# Altium PCB GalvoPrint.PcbDoc
Units mm, origin at the board's own origin, x right, y up, seen from the top; angles counter-clockwise.
Board outline 100 x 50 mm, 2 copper layers (Top Layer, Bottom Layer); 85 components, 142 nets, 366 pads, 181 vias.
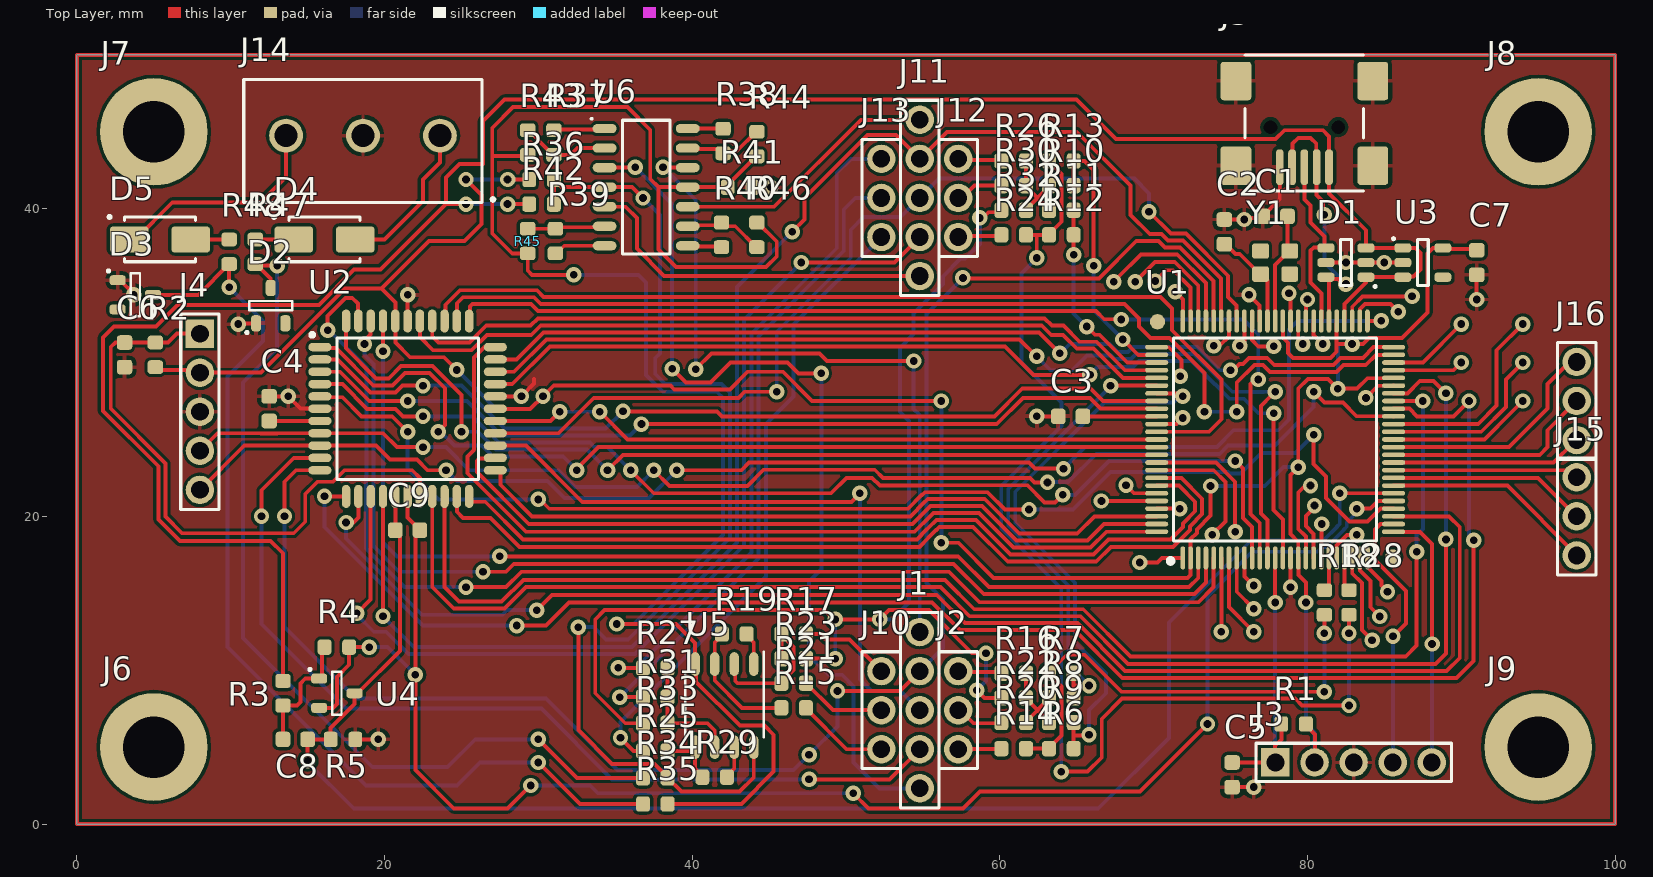
[diagram p0: Top Layer view]
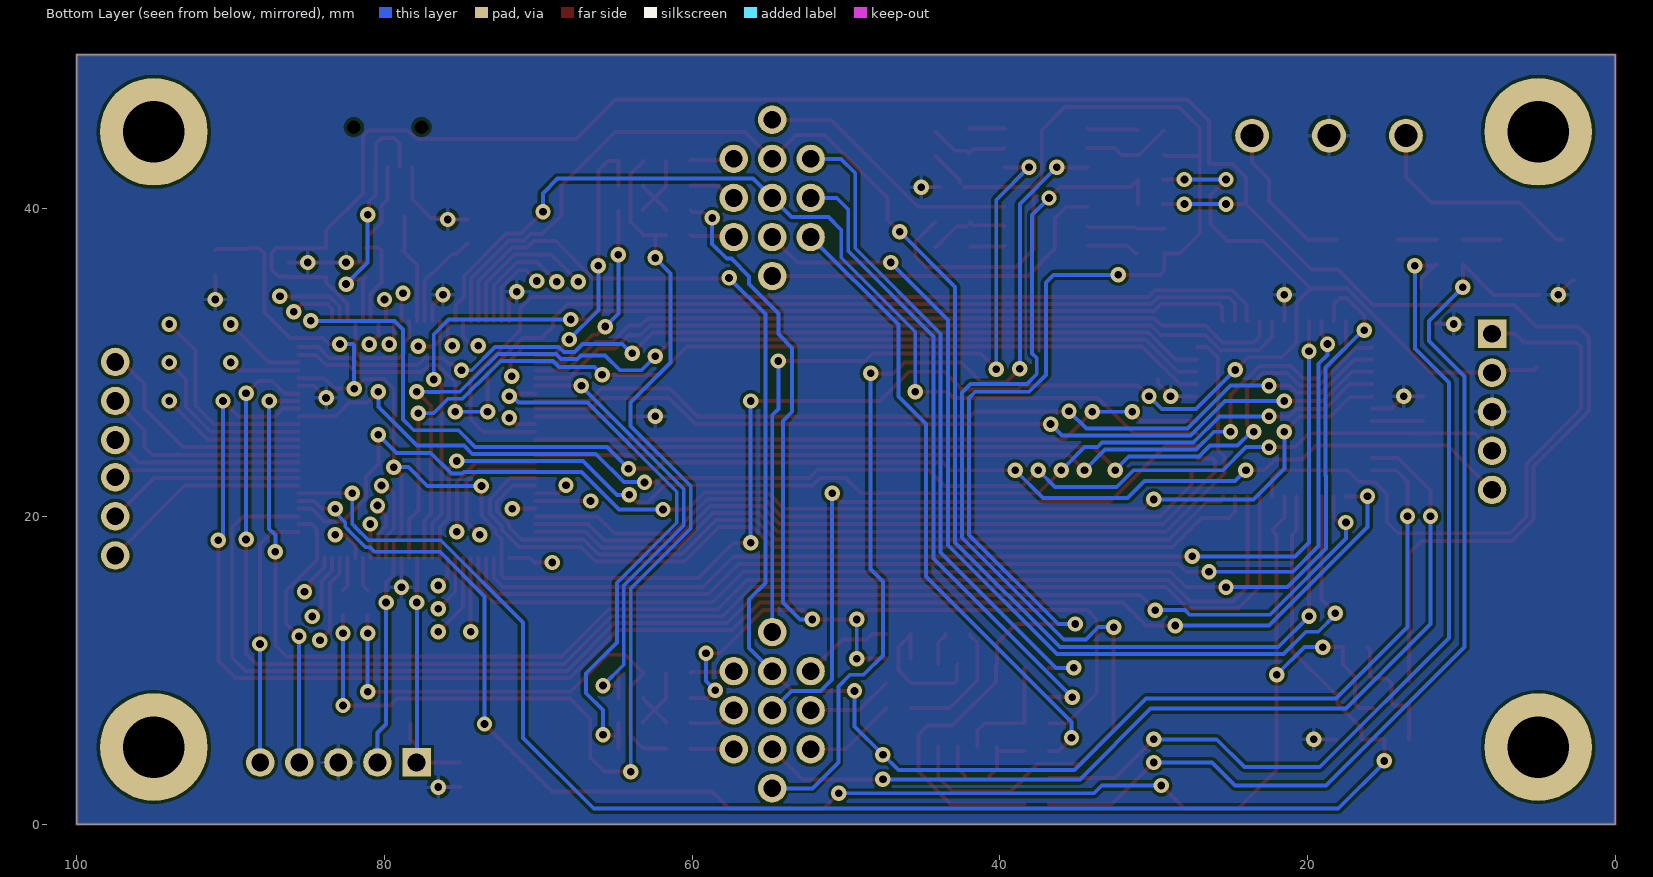
[diagram p1: Bottom Layer view, seen from below]
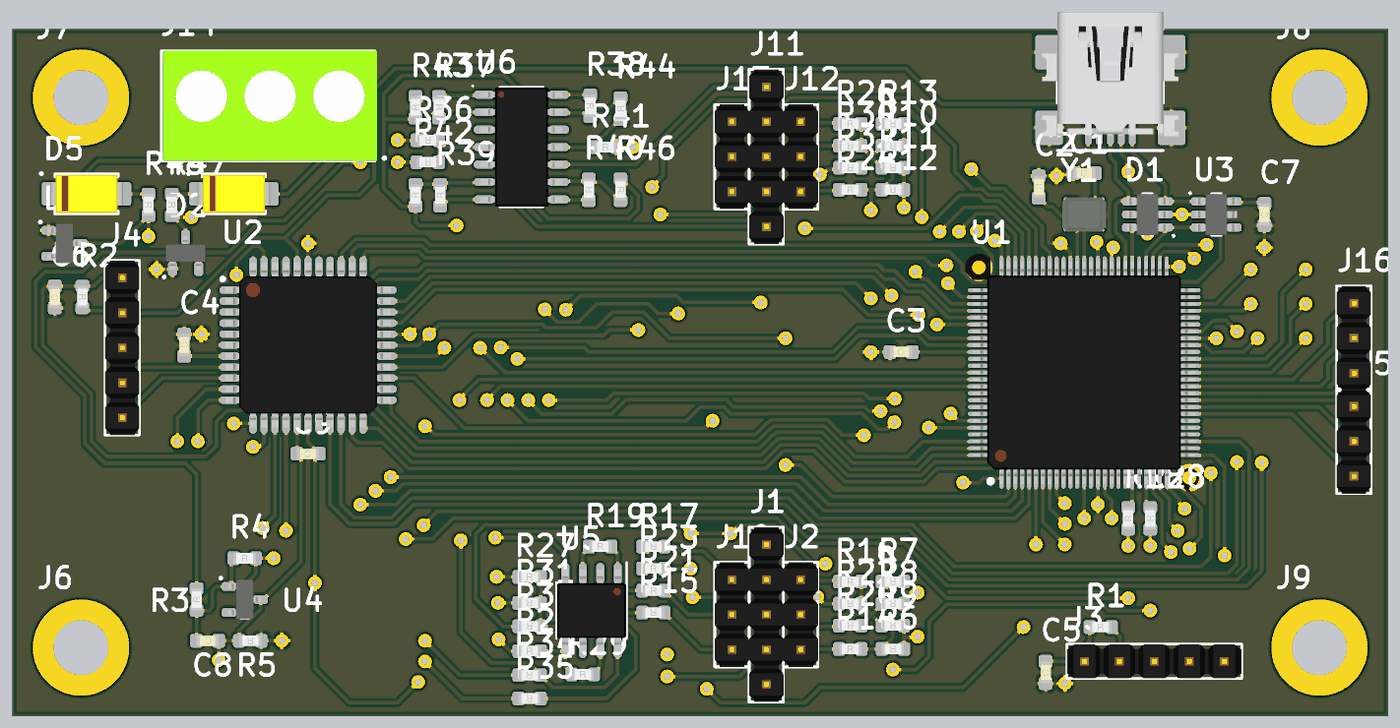
[diagram p2: 3D render of the assembled board from above, using the file's embedded part models]

## Layer stack, top to bottom
Top Solder: solder mask 0.0102, Solder Resist, Dk 3.5
Top Layer: signal copper 0.0356
Dielectric 1: dielectric 0.32, FR-4, Dk 4.8
Bottom Layer: signal copper 0.0356
Bottom Solder: solder mask 0.0102, Solder Resist, Dk 3.5

## Board outline
0,0 100,0 100,50 0,50

## Design rules (kind name [scope] priority, off if disabled: settings)
Clearance [All] p1: gap=0.2 ignorepadtopadclearanceinfootprint=FALSE
ComponentClearance [All] p1 off: gap=0.254 collisioncheckmode=3 verticalgap=0.254 showdistances=FALSE
PolygonConnect [All] p1: connectstyle=Relief reliefconductorwidth=0.254 reliefentries=4 polygonreliefangle="90 Angle" airgapwidth=0.254
RoomDefinition GalvoPrint [InComponentClass('GalvoPrint')] p1: confinementstyle=ConfineIn formatcopy=TRUE lockcomponents=FALSE outline 0,0 152.4,0 152.4,101.585 0,101.585
RoutingVias [All] p1: holewidth=0.711 width=1.27 viastyle="Through Hole" minholewidth=0.711 minwidth=1.27 maxholewidth=0.711 maxwidth=1.27
SolderMaskExpansion [All] p1: expansion=0.102
Width [All] p1: maxlimit=5 minlimit=0.2 preferedwidth=0.25
29 further rules are at their usual default settings.

## Components (designator, comment, footprint, x,y, rotation, side; value= is the part's Value field where it differs from the comment)
C1 "C" 0603_C 77.9,39.5 r0 top value=22pF
C2 "C" 0603_C 74.6,38.5 r270 top value=22pF
C3 "C" 0603_C 64.6,26.5 r0 top value=10uF
C4 "C" 0603_C 12.5,27 r270 top value=10uF
C5 "C" 0603_C 75.1,3.2 r90 top value=100nF
C6 "C" 0603_C 3.1,30.5 r90 top value=100nF
C7 "C" 0603_C 91,36.5 r90 top value=10uF
C8 "C" 0603_C 14.2,5.5 r180 top value=10uF
C9 "C" 0603_C 21.5,19.1 r0 top value=10uF
D1 "SMS05T1G" SOT23_6 82.5,36.5 r180 top
D2 "10V" SOT23_3 12.6,33.7 r90 top
D3 "10V" SOT23_3 3.8,34.4 r0 top
D4 "1N4007" SMA 16.102,38 r0 top
D5 "1N4007" SMA 5.4,38 r0 top
J1 "CON_5" HDR_254_5#1 54.8,7.4 r90 top
J2 "CON_3" HDR_254_3 57.3,7.4 r90 top
J3 "CON_5" HDR_254_5#2 83,4 r0 top value=PGM
J4 "CON_5" HDR_254_5#2 8,26.8 r270 top value=PGM
J5 "CON_USB" CON_USB_MINI 79.8,45.3 r180 top
J6 "CON_1" MOUNT_HOLE#1 5,5 r0 top
J7 "CON_1" MOUNT_HOLE#2 4.9,45 r0 top
J8 "CON_1" MOUNT_HOLE#1 95,45 r0 top
J9 "CON_1" MOUNT_HOLE#1 95,5 r0 top
J10 "CON_3" HDR_254_3 52.3,7.4 r90 top
J11 "CON_5" HDR_254_5#1 54.8,40.7 r90 top
J12 "CON_3" HDR_254_3 57.3,40.7 r90 top
J13 "CON_3" HDR_254_3 52.3,40.7 r90 top
J14 "CON_3" HDR_500_3 18.6,44.4 r180 top
J15 "CON_3" HDR_254_3 97.5,20 r90 top
J16 "CON_3" HDR_254_3 97.5,27.5 r90 top
R1 "R" 0603_R 79.1,6.5 r0 top value=4K7
R2 "R" 0603_R 5.1,30.5 r270 top value=4K7
R3 "R" 0603_R 13.4,8.5 r90 top value=1K
R4 "R" 0603_R 16.9,11.5 r0 top value=0R
R5 "R" 0603_R 17.3,5.5 r180 top value=0R
R6 "0" 0603_R 64,4.9 r180 top
R7 "=Value" 0603_R 64,9.8 r180 top
R8 "0" 0603_R 64,8.2 r180 top
R9 "=Value" 0603_R 64,6.6 r180 top
R10 "0" 0603_R 64,41.5 r180 top
R11 "=Value" 0603_R 64,39.9 r180 top
R12 "0" 0603_R 64,38.3 r180 top
R13 "=Value" 0603_R 64,43.1 r180 top
R14 "10k" 0603_R 60.9,4.9 r0 top
R15 "10k" 0603_R 46.6,7.55 r180 top
R16 "10k" 0603_R 60.9,9.8 r0 top
R17 "10k" 0603_R 46.6,12.35 r180 top
R18 "10k" 0603_R 81.1,14.4 r90 top
R19 "10k" 0603_R 42.735,12.35 r0 top
R20 "10k" 0603_R 60.9,6.6 r180 top
R21 "10k" 0603_R 46.6,9.15 r0 top
R22 "10k" 0603_R 60.9,8.2 r180 top
R23 "10k" 0603_R 46.6,10.75 r0 top
R24 "10k" 0603_R 60.9,38.3 r0 top
R25 "10k" 0603_R 37.6,4.75 r0 top
R26 "10k" 0603_R 60.9,43.1 r0 top
R27 "10k" 0603_R 37.6,10.15 r0 top
R28 "10k" 0603_R 82.7,14.4 r90 top
R29 "10k" 0603_R 41.465,3.05 r0 top
R30 "10k" 0603_R 60.9,41.5 r180 top
R31 "10k" 0603_R 37.6,8.25 r180 top
R32 "10k" 0603_R 60.9,39.9 r180 top
R33 "10k" 0603_R 37.6,6.55 r180 top
R34 "0" 0603_R 37.6,3 r180 top
R35 "0" 0603_R 37.6,1.3 r180 top
R36 "0" 0603_R 30.208,41.9 r180 top
R37 "10k" 0603_R 31.008,44.3 r270 top
R38 "10k" 0603_R 42.008,44.4 r270 top
R39 "10k" 0603_R 31.108,37.9 r90 top
R40 "10k" 0603_R 41.908,38.3 r90 top
R41 "0" 0603_R 43.108,41.4 r0 top
R42 "0" 0603_R 30.208,40.3 r180 top
R43 "10k" 0603_R 29.308,44.3 r90 top
R44 "10k" 0603_R 44.208,44.2 r90 top
R45 "10k" 0603_R 29.308,37.9 r90 top
R46 "10k" 0603_R 44.208,38.3 r270 top
R47 "R" 0603_R 11.6,37.2 r270 top value=200
R48 "R" 0603_R 9.9,37.2 r270 top value=200
U1 "IC_PIC24FJ128GC010" TQFP_100 77.9,25 r90 top locked value=PIC24FJ128GC010
U2 "IC_PIC33FJ128GP804" TQFP_44 21.5,27 r0 top locked value=PIC33FJ128GP804
U3 "BU33TD3WG" SOT23_5 87.5,36.5 r0 top
U4 "IC_TL431_SOT23_3" SOT23_3 16.9,8.5 r0 top value=TL431
U5 "MCP6022" SOIC_8 42.1,7.697 r270 top
U6 "MCP6024" SOIC_14 37.008,41.4 r0 top
Y1 "XTAL_OSC1OSC3" OSC_DFN_2x2.5mm 77.9,36.5 r270 top value=OSC

## Footprints (in the part's own frame and the unit in brackets; to place one, negate y for a bottom-side part, rotate by r counter-clockwise, add the part's x,y. Pads: shape width x height; smd on the part's side, far side on the other; paste and mask are expansions set on the pad)
0603_C [mm]
  rrect42% 0.95x1 smd mask+0.075: 1(-0.8,0) 2(0.8,0)
  body extent -0.8,-0.4 0.8,0.4, height 0.95
0603_R [mm]
  rrect44% 0.9x1 smd mask+0.075: 1(-0.8,0) 2(0.8,0)
  body extent -0.8,-0.4 0.8,0.4, height 0.55
CON_USB_MINI [mm]
  rrect80% 0.5x2.3 smd mask+0.075: 1(-1.6,2.6) 2(-0.8,2.6) 3(0,2.6) 4(0.8,2.6) 5(1.6,2.6)
  rrect20% 2x2.5 smd mask+0.075: 6(4.45,2.5) 7(4.45,-3) 8(-4.45,-3) 9(-4.45,2.5)
  round 0.5 hole 0.9 unplated mask+0.275: 10(-2.2,0) 11(2.2,0)
  silkscreen extent -3.85,-4.7 3.85,4.15, body extent -4.95,-5.9 4.95,3.1, height 3.95
HDR_254_3 [mm]
  round 1.85 hole 1.15 mask+0.075: 1(-2.54,0) 2(0,0) 3(2.54,0)
  silkscreen extent -3.8,-1.25 3.8,1.25, body extent -3.81,-1.25 3.81,1.25, height 8
HDR_254_5#1 [mm]
  round 1.85 hole 1.15 mask+0.075: 1(-5.08,0) 2(-2.54,0) 3(0,0) 4(2.54,0) 5(5.08,0)
  silkscreen extent -6.35,-1.25 6.35,1.25, body extent -6.35,-1.25 6.35,1.25, height 8
HDR_254_5#2 [mm]
  rect 1.85x1.85 hole 1.15 mask+0.075: 1(-5.08,0)
  round 1.85 hole 1.15 mask+0.075: 2(-2.54,0) 3(0,0) 4(2.54,0) 5(5.08,0)
  silkscreen extent -6.35,-1.25 6.35,1.25, body extent -6.35,-1.25 6.35,1.25, height 8
HDR_500_3 [mm]
  round 2.2 hole 1.5 mask+0.075: 1(-5,-0.35) 2(0,-0.35) 3(5,-0.35)
  silkscreen extent -8.65,-4 7.75,4, body extent -7.9,-4 7.6,4, height 11
MOUNT_HOLE#1 [mm]
  round 7 hole 4: 1(0,0)
MOUNT_HOLE#2 [mm]
  round 7 hole 4: 1(0.1,0)
OSC_DFN_2x2.5mm [mm]
  rrect33% 1x1.1 smd mask+0.075: 1(-0.75,0.95) 2(-0.75,-0.95) 3(0.75,-0.95) 4(0.75,0.95)
  body extent -1.25,-1.6 1.25,1.6, height 1
SMA [mm]
  rrect24% 2.5x1.7 smd mask+0.075: 1(-2,0) 2(2,0)
  silkscreen extent -3.46,-1.45 2.3,1.65, body extent -2.64,-1.39 2.64,1.4, height 2.29
SOIC_8 [mm]
  oval 1.55x0.6 smd mask+0.075: 1(-2.7,1.905) 2(-2.7,0.635) 3(-2.7,-0.635) 4(-2.7,-1.905) 5(2.7,-1.905) 6(2.7,-0.635) 7(2.7,0.635) 8(2.7,1.905)
  silkscreen extent -3.5,-2.55 2.05,2.55, body extent -3,-2.5 3,2.5, height 1.75
SOIC_14 [mm]
  oval 1.55x0.6 smd mask+0.075: 1(-2.7,3.81) 2(-2.7,2.54) 3(-2.7,1.27) 4(-2.7,0) 5(-2.7,-1.27) 6(-2.7,-2.54) 7(-2.7,-3.81) 8(2.7,-3.81) 9(2.7,-2.54) 10(2.7,-1.27) 11(2.7,0) 12(2.7,1.27) 13(2.7,2.54) 14(2.7,3.81)
  silkscreen extent -3.66,-4.35 1.55,4.56, body extent -3,-4.32 3,4.33, height 1.75
SOT23_3 [mm]
  rrect62% 1.05x0.65 smd mask+0.075: 1(-1.15,0.95) 2(-1.15,-0.95) 3(1.15,0)
  silkscreen extent -1.82,-1.4 0.3,1.62, body extent -1.2,-1.45 1.2,1.45, height 1.2
SOT23_5 [mm]
  rrect67% 1.1x0.6 smd mask+0.075: 1(-1.3,0.95) 2(-1.3,0) 3(-1.3,-0.95) 4(1.3,-0.95) 5(1.3,0.95)
  silkscreen extent -2.05,-1.5 0.35,1.7, body extent -1.5,-1.5 1.5,1.5, height 1.2
SOT23_6 [mm]
  rrect67% 1.1x0.6 smd mask+0.075: 1(-1.3,0.95) 2(-1.3,0) 3(-1.3,-0.95) 4(1.3,-0.95) 5(1.3,0) 6(1.3,0.95)
  silkscreen extent -2.05,-1.5 0.35,1.7, body extent -1.5,-1.5 1.5,1.5, height 1.2
TQFP_44 [mm]
  oval 1.5x0.55 smd mask+0.05: 1(-5.7,4) 2(-5.7,3.2) 3(-5.7,2.4) 4(-5.7,1.6) 5(-5.7,0.8) 6(-5.7,0) 7(-5.7,-0.8) 8(-5.7,-1.6) 9(-5.7,-2.4) 10(-5.7,-3.2) 11(-5.7,-4) 23(5.7,-4) 24(5.7,-3.2) 25(5.7,-2.4) 26(5.7,-1.6) 27(5.7,-0.8) 28(5.7,0) 29(5.7,0.8) 30(5.7,1.6) 31(5.7,2.4) 32(5.7,3.2) 33(5.7,4)
  oval 0.55x1.5 smd mask+0.05: 12(-4,-5.7) 13(-3.2,-5.7) 14(-2.4,-5.7) 15(-1.6,-5.7) 16(-0.8,-5.7) 17(0,-5.7) 18(0.8,-5.7) 19(1.6,-5.7) 20(2.4,-5.7) 21(3.2,-5.7) 22(4,-5.7) 34(4,5.7) 35(3.2,5.7) 36(2.4,5.7) 37(1.6,5.7) 38(0.8,5.7) 39(0,5.7) 40(-0.8,5.7) 41(-1.6,5.7) 42(-2.4,5.7) 43(-3.2,5.7) 44(-4,5.7)
  silkscreen extent -6.32,-4.6 4.6,4.92, body extent -6,-6 6,6, height 1.2
TQFP_100 [mm]
  oval 1.5x0.3 smd mask+0.05: 1(-7.7,6) 2(-7.7,5.5) 3(-7.7,5) 4(-7.7,4.5) 5(-7.7,4) 6(-7.7,3.5) 7(-7.7,3) 8(-7.7,2.5) 9(-7.7,2) 10(-7.7,1.5) 11(-7.7,1) 12(-7.7,0.5) 13(-7.7,0) 14(-7.7,-0.5) 15(-7.7,-1) 16(-7.7,-1.5) 17(-7.7,-2) 18(-7.7,-2.5) 19(-7.7,-3) 20(-7.7,-3.5) 21(-7.7,-4) 22(-7.7,-4.5) 23(-7.7,-5) 24(-7.7,-5.5) 25(-7.7,-6) 51(7.7,-6) 52(7.7,-5.5) 53(7.7,-5) 54(7.7,-4.5) 55(7.7,-4) 56(7.7,-3.5) 57(7.7,-3) 58(7.7,-2.5) 59(7.7,-2) 60(7.7,-1.5) 61(7.7,-1) 62(7.7,-0.5) 63(7.7,0) 64(7.7,0.5) 65(7.7,1) 66(7.7,1.5) 67(7.7,2) 68(7.7,2.5) 69(7.7,3) 70(7.7,3.5) 71(7.7,4) 72(7.7,4.5) 73(7.7,5) 74(7.7,5.5) 75(7.7,6)
  oval 0.3x1.5 smd mask+0.05: 26(-6,-7.7) 27(-5.5,-7.7) 28(-5,-7.7) 29(-4.5,-7.7) 30(-4,-7.7) 31(-3.5,-7.7) 32(-3,-7.7) 33(-2.5,-7.7) 34(-2,-7.7) 35(-1.5,-7.7) 36(-1,-7.7) 37(-0.5,-7.7) 38(0,-7.7) 39(0.5,-7.7) 40(1,-7.7) 41(1.5,-7.7) 42(2,-7.7) 43(2.5,-7.7) 44(3,-7.7) 45(3.5,-7.7) 46(4,-7.7) 47(4.5,-7.7) 48(5,-7.7) 49(5.5,-7.7) 50(6,-7.7) 76(6,7.7) 77(5.5,7.7) 78(5,7.7) 79(4.5,7.7) 80(4,7.7) 81(3.5,7.7) 82(3,7.7) 83(2.5,7.7) 84(2,7.7) 85(1.5,7.7) 86(1,7.7) 87(0.5,7.7) 88(0,7.7) 89(-0.5,7.7) 90(-1,7.7) 91(-1.5,7.7) 92(-2,7.7) 93(-2.5,7.7) 94(-3,7.7) 95(-3.5,7.7) 96(-4,7.7) 97(-4.5,7.7) 98(-5,7.7) 99(-5.5,7.7) 100(-6,7.7)
  round 1 smd paste-0.5 mask+0.5: 101(-7.65,-7.65) 102(7.65,7.65)
  silkscreen extent -8.01,-6.6 6.6,6.91, body extent -8.1,-8.1 8.1,8.1, height 1.7

## Part data
C1 C2 C3 C4 C5 C6 C7 C8 C9: "Capacitor", LatestRevisionDate=17-Jul-2002, LatestRevisionNote="Re-released for DXP Platform.", PackageDescription="Radial Cap, Thru-Hole; 2 Leads; 0.3 in Pin Spacing", PackageReference=RAD-0.3, Published=8-Jun-2000, Publisher="Altium Limited"
D1: library part D_TVS_QUAD_C1AA2AA5C3C4C6, "TVS like SMS05T1G"
D2 D3: library part D_A1C3, "Diodes like 1N4148"
D4 D5: library part D, "Diode"
J1 J3 J4 J11: "Header 5 Pins"
J2 J10 J12 J13 J14 J15 J16: "Header 3 Pins"
J6 J7 J8 J9: "Mounting Hole"
R1 R2 R3 R4 R5 R47 R48: "Resistor", LatestRevisionDate=17-Jul-2002, LatestRevisionNote="Re-released for DXP Platform.", PackageDescription="Axial Device, Thru-Hole; 2 Leads; 0.3 in Pin Spacing", PackageReference=AXIAL-0.3, Published=8-Jun-2000, Publisher="Altium Limited"
R6 R7 R8 R9 R10 R11 R12 R13 R14 R15 R16 R17 R18 R19 R20 R21 R22 R23 R24 R25 R26 R27 R28 R29 R30 R31 R32 R33 R34 R35 R36 R37 R38 R39 R40 R41 R42 R43 R44 R45 R46: library part R, "Resistor", LatestRevisionDate=17-Jul-2002, LatestRevisionNote="Re-released for DXP Platform.", PackageDescription="Axial Device, Thru-Hole; 2 Leads; 0.3 in Pin Spacing", PackageReference=AXIAL-0.3, Published=8-Jun-2000, Publisher="Altium Limited"
U3: library part IC_BU33TD3WG, "LDO 5 to 3.3V"
U5: library part IC_MCP6022, "Opamp x 2"
U6: library part IC_MCP6024, "Opamp x 4"

## Via types
v1: diameter 1, hole 0.5, Top Layer to Bottom Layer, 181 vias

## Nets (pads, with @x,y where several pads share a name; then routed paths per layer and width w, separated by ;. In a path a pad name is that pad's centre, name@x,y a point inside that pad or via, vN(x,y) a via of type N, cw(c..) or ccw(c..) an arc to the next point about the centre after c; other vN are vias at no path point)
2.5V: C8.2 R3.1 R4.1 U4.1 | length 8.2
  Top Layer w0.254: C8.2 R3.1 14.3,7.7 14.543,7.943 14.543,9.145 14.849,9.45 U4.1 15.925,9.625 15.925,11.325 R4.1
5.0V: D1.1 D1.3 J5.1 R3.2 R42.2 U1.54 U3.1 U3.3 | length 146.5
  Top Layer w0.254: R3.2 13.4,17.6 12.6,18.4 6.7,18.4 5.3,19.8 5.3,23.258 1.7,26.858 1.7,31.623 2.414,32.337 5.137,32.337 6.548,33.748 15.729,33.748 18.023,36.042 19.742,36.042 24,40.3 ; v1(25.3,40.3) 24,40.3 ; v1(28,40.3) R42.2 ; U1.54 82.409,32.709 82.409,33.809 83.8,35.2 D1.1 U3.3 86.231,35.581 86.881,35.581 87.346,36.046 87.346,37.129 87.025,37.45 U3.1 D1.3 83.8,38.6 81.4,41 J5.1 81.4,44.7 81,45.1 78.499,45.1 77.922,44.523 67.565,44.523 64.988,47.1 27.8,47.1 26.4,45.7 26.4,42.9 24.881,42.9 24,42.019 24,40.3
  Bottom Layer w0.254: v1(25.3,40.3) v1(28,40.3)
10V: D2.3 R34.2 R47.2 | length 59.8
  Top Layer w0.254: D2.3 12.6,35.45 R47.2@11.75,36.3 ; v1(13.021,36.3) R47.2@11.75,36.3 ; v1(30,5.5) 32.5,3 R34.2 ; R47.2@11.7,36.35 R47.2@11.75,36.3 ; R47.2@11.7,36.35 11.65,36.4 R47.2 11.65,36.35 R47.2@11.7,36.35
  Bottom Layer w0.254: v1(13.021,36.3) 13.021,30.921 10.8,28.7 10.8,12.1 19.2,3.7 24.1,3.7 25.9,5.5 v1(30,5.5)
15V: D4.2 J14.1 | length 10.1
  Top Layer w0.254: D4.2 20,38 22.5,40.5 22.5,41.9 23.6,43 J14.1
"15V PROT": D4.1 R47.1 | length 2.5
  Top Layer w0.254: R47.1 D4.1
-10V: D3.3 R35.2 R48.2 | length 65
  Top Layer w0.254: D3.3 7.9,34.4 R48.2 v1(9.9,34.9) ; v1(30,4) 32.7,1.3 R35.2
  Bottom Layer w0.254: v1(9.9,34.9) 12.1,32.7 12.1,31.4 9.8,29.1 9.8,11.5 18.8,2.5 24.7,2.5 26.2,4 v1(30,4)
-15V: D5.1 J14.3 | length 14.6
  Top Layer w0.254: D5.1 3.8,38 6.2,40.4 11.943,40.4 13.6,42.057 J14.3
"-15V PROT": D5.2 R48.1 | length 2.5
  Top Layer w0.254: D5.2 R48.1
ADCCH0+: J15.3 U1.34 | length 12.1
  Top Layer w0.254: U1.34 97,23 J15.3@97.5,22.5
ADCCH0-: J15.2 U1.33 | length 12.9
  Top Layer w0.254: U1.33 95,22.5 J15.2
ADCCH1+: J16.2 U1.36 | length 14
  Top Layer w0.254: U1.36 95.1,24 95.6,24.5 95.6,25.6 J16.2
ADCCH1-: J16.1 U1.35 | length 12.4
  Top Layer w0.254: U1.35 96,23.5 97.285,24.785 J16.1@97.5,24.785
ADCGND: J15.1 U1.32 | length 13.8
  Top Layer w0.254: U1.32@85.609,22.009 U1.32 93,22 J15.1@97.5,17.5
ADCVDD: J16.3 U1.37 | length 15.1
  Top Layer w0.254: U1.37 93.1,24.5 95.6,27 95.6,28.6 97,30 J16.3@97.5,30
D+: D1.4 J5.3 U1.57 | length 11.6
  Top Layer w0.254: J5.3 79.8,40.6 80.2,40.2 80.2,39.1 81.119,38.181 81.119,37.369 D1.4 ; U1.57 80.9,34.5 80.2,35.2 80.2,37.275 80.41,37.485 D1.4@80.9,37.485
D-: D1.6 J5.2 J5.4 U1.56 | length 17.8
  Top Layer w0.254: J5.4 79.031,42.731 79.031,44.231 79.4,44.6 80.2,44.6 80.569,44.231 80.569,42.731 J5.2 80.6,40.9 81.019,40.481 81.019,39.681 v1(81.1,39.6) ; U1.56 81.391,32.709 81.391,35.383 D1.6@81.351,35.423 ; v1(82.5,35.1) 82.298,35.1 81.975,35.423 D1.6@81.351,35.423 ; D1.6@81.351,35.423 81.327,35.423 D1.6 81.224,35.55 D1.6@81.351,35.423
  Bottom Layer w0.254: v1(81.1,39.6) 81.1,36.5 v1(82.5,35.1)
DAC1LM: J11.3 U1.68 U2.26 | length 64.3
  Top Layer w0.254: U2.26 31.3,25.4 33.6,27.7 43,27.7 43.4,28.1 v1(45.5,28.1) ; v1(69.7,39.8) 71.116,38.384 72.1,38.384 74.845,35.639 74.845,34.255 75.391,33.709 75.391,32.709 U1.68
  Bottom Layer w0.254: v1(45.5,28.1) 45.5,32.002 50.308,36.81 50.308,38.608 51.148,39.448 53.548,39.448 J11.3 56.052,41.952 68.748,41.952 69.7,41 v1(69.7,39.8)
DAC1LME: J13.2 R31.2 | length 42
  Top Layer w0.254: v1(35.3,8.25) R31.2
  Bottom Layer w0.254: v1(35.3,8.25) 44.3,17.25 44.3,31.685 49.854,37.239 49.854,39.954 50.6,40.7 J13.2
DAC1LMI: J12.2 R30.2 | length 3.1
  Top Layer w0.254: J12.2 57.547,40.7 58.347,41.5 R30.2
DAC1LN: J11.4 U1.70 U2.15 | length 96.7
  Top Layer w0.254: v1(19.898,13.502) 19.898,21.298 U2.15 ; v1(46.5,38.5) 47.3,39.3 47.3,40.7 51.4,44.8 53.24,44.8 J11.4 56.56,45 65,45 68.5,41.5 68.5,39.6 69.746,38.354 70.504,38.354 70.928,37.93 71.912,37.93 74.391,35.451 74.391,32.709 U1.70
  Bottom Layer w0.254: v1(19.898,13.502) 21.9,11.5 36.1,11.5 42.908,18.308 42.908,34.908 v1(46.5,38.5)
DAC1LNE: J13.3 R27.1 | length 43.6
  Top Layer w0.254: v1(35.2,10.15) R27.1
  Bottom Layer w0.254: v1(35.2,10.15) 36.358,10.15 43.846,17.638 43.846,31.873 49.4,37.427 49.4,42.327 50.313,43.24 J13.3
DAC1LNE2: J11.5 U6.10 | length 17.4
  Top Layer w0.254: U6.10 45.33,40.13 50.98,45.78 J11.5
DAC1LNER: R27.2 R31.1 R33.1 U5.6 | length 7.8
  Top Layer w0.254: R33.1 41,6.55 41.465,6.085 U5.6 ; R33.1@38.4,6.7 R31.1 R27.2
DAC1LNI: J12.3 R26.1 | length 2.9
  Top Layer w0.254: J12.3 57.37,43.17 60.03,43.17 R26.1
DAC1LNINT: R10.1 R13.1 U1.77 | length 17.5
  Top Layer w0.254: R10.1 R13.1 65.5,43.1 66.1,42.5 v1(66.1,36.3) ; v1(68,31.5) 69,30.5 U1.77
  Bottom Layer w0.254: v1(66.1,36.3) 66.1,33.4 v1(68,31.5)
DAC1LNIR: R10.2 R11.2 R26.2 R30.1 R32.1 | length 6.7
  Top Layer w0.254: R32.1 61.7,39.95 62.45,40.7 ; R30.1 R30.1@61.7,41.45 ; R26.2 R30.1@61.7,41.45 ; 62.15,41 R30.1@61.7,41.45 ; R11.2 63.2,39.95 62.45,40.7 ; R10.2 63.2,41.45 62.45,40.7 ; R30.1@61.7,41.45 62.45,40.7
DAC1LNNEGE2: R40.2 R46.2 U6.9 | length 5.3
  Top Layer w0.254: U6.9 39.774,38.926 41.734,38.926 R40.2 42.15,38.858 42.8,38.858 44.158,37.5 R46.2
DAC1LNOUTE2: R40.1 U6.8 | length 2.2
  Top Layer w0.254: U6.8 39.753,37.545 41.863,37.545 R40.1
DAC1LOUT: R28.2 U1.22 | length 2.2
  Top Layer w0.254: U1.22 82.409,17.291 82.409,15.491 R28.2
DAC1LOUTE: R29.2 U5.7 | length 2.1
  Top Layer w0.254: R29.2 42.265,3.138 42.735,3.608 U5.7
DAC1LP: J11.2 U2.14 | length 65.5
  Top Layer w0.254: v1(18.2,13.7) 19.1,14.6 U2.14 ; v1(47.1,36.5) 53.14,36.5 J11.2
  Bottom Layer w0.254: v1(18.2,13.7) 18.2,13.6 19.3,12.5 20.1,12.5 21.554,11.046 36.288,11.046 43.362,18.12 43.362,32.762 v1(47.1,36.5)
DAC1LPE: J13.1 R25.1 | length 41.4
  Top Layer w0.254: v1(35.343,5.6) 36.193,4.75 R25.1
  Bottom Layer w0.254: v1(35.343,5.6) 35.343,6.643 44.8,16.1 44.8,26 46.6,27.8 46.6,32.46 J13.1
DAC1LPE2: J11.1 U6.5 | length 23.5
  Top Layer w0.254: U6.5 35.67,40.13 36.4,39.4 36.4,37.4 38.18,35.62 J11.1
DAC1LPER: R25.2 R29.1 U5.5 | length 4
  Top Layer w0.254: R25.2 40.036,4.75 U5.5@40.195,4.91 ; U5.5 U5.5@40.195,4.91 ; R29.1 40.665,3.138 40.195,3.608 U5.5@40.195,4.91
DAC1LPI: J12.1 R24.1 | length 2.9
  Top Layer w0.254: J12.1 57.37,38.23 60.03,38.23 R24.1
DAC1LPINT: R11.1 R12.1 U1.78 | length 13.4
  Top Layer w0.254: v1(64.8,37) R12.1 R11.1 ; v1(65.648,32.337) 66.177,31.808 66.476,31.808 68.284,30 U1.78
  Bottom Layer w0.254: v1(64.8,37) 64.8,33.185 v1(65.648,32.337)
DAC1LPIR: R12.2 R13.2 R24.2 R28.1 | length 74.8
  Top Layer w0.254: R24.2 62.4,38.3 ; v1(62.4,36.8) 62.4,38.3 ; R13.2 63.2,43.05 64,42.25 64,39.15 63.2,38.35 R12.2 62.4,38.3 ; v1(64,3.4) 65.7,3.4 66.627,4.327 66.627,6.827 67.946,8.146 79.206,8.146 79.652,7.7 v1(82.7,7.7) ; v1(82.7,12.4) R28.1
  Bottom Layer w0.254: v1(62.4,36.8) 61.4,35.8 61.4,30 64,27.4 64,25.884 60.092,21.976 60.092,19.208 63.992,15.308 63.992,3.408 v1(64,3.4) ; v1(82.7,7.7) v1(82.7,12.4)
DAC1LPNEGE2: R39.2 R45.2 U6.6 | length 5.1
  Top Layer w0.254: R45.2 R39.2 31.202,38.794 34.242,38.794 U6.6
DAC1LPOUTE2: R39.1 U6.7 | length 3.4
  Top Layer w0.254: R39.1 31.196,37.1 31.686,37.59 U6.7
DAC1RM: J1.3 U2.25 | length 42.3
  Top Layer w0.254: U2.25 29.2,24.6 32.854,20.946 50.346,20.946 v1(50.9,21.5)
  Bottom Layer w0.254: v1(50.9,21.5) 50.9,9.4 51.648,8.652 53.548,8.652 J1.3
DAC1RME: J10.2 R21.2 | length 5.6
  Top Layer w0.254: R21.2 49.15,7.4 J10.2
DAC1RMI: J2.2 R20.2 | length 3.2
  Top Layer w0.254: J2.2 57.447,7.4 58.297,6.55 60.05,6.55 R20.2
DAC1RN: J1.4 U1.71 U2.11 | length 109.8
  Top Layer w0.254: v1(13.5,20) 13.5,22.252 14.248,23 U2.11 ; v1(49.448,8.652) 53.512,8.652 J1.4 ; v1(57.6,35.5) 57.627,35.473 66.443,35.473 68.87,37.9 70.316,37.9 70.74,37.476 71.724,37.476 73.891,35.309 73.891,32.709 U1.71
  Bottom Layer w0.254: v1(13.5,20) 13.5,12.8 18.146,8.154 30.488,8.154 35.142,3.5 46.6,3.5 v1(47.6,4.5) 49.448,6.348 v1(49.448,8.652) ; J1.4 56.3,11.44 56.3,14.61 55.246,15.664 55.246,33.146 v1(57.6,35.5)
DAC1RNE: J10.3 R17.1 | length 5.9
  Top Layer w0.254: R17.1 48.3,12.35 48.65,12 50.24,12 J10.3
DAC1RNE2: J1.5 U6.12 | length 48.2
  Top Layer w0.254: v1@38.115,42.685 39.693,42.685 U6.12 ; v1(40.233,29.573) 41.26,30.6 48.27,30.6 48.77,30.1 v1(54.4,30.1)
  Bottom Layer w0.254: v1(38.1,42.7) 40.233,40.567 v1(40.233,29.573) ; v1(54.4,30.1) 54.4,26.973 54.792,26.581 54.792,12.488 J1.5
DAC1RNER: R17.2 R21.1 R23.1 U5.2 | length 9.6
  Top Layer w0.254: U5.2 42.801,10.331 42.801,9.299 42.95,9.15 45.75,9.15 46.6,10 46.6,11.5 R17.2@45.8,12.3 ; R23.1 R17.2@45.8,12.3 ; R17.2 R17.2@45.8,12.3
DAC1RNI: J2.3 R16.1 | length 2.9
  Top Layer w0.254: J2.3 57.37,9.87 60.03,9.87 R16.1
DAC1RNINT: R6.1 R9.1 U1.82 | length 36.7
  Top Layer w0.254: R6.1 64.8,5.75 ; R9.1 64.8,5.75 ; v1(65.8,5.8) 65.75,5.75 64.8,5.75 ; U1.82 71.498,28 71.698,27.8 v1(71.9,27.8)
  Bottom Layer w0.254: v1(65.8,5.8) 65.8,7.4 66.9,8.5 66.9,9.8 64.9,11.8 64.9,15.684 61,19.584 61,21.6 66.8,27.4 71.3,27.4 71.7,27.8 v1(71.9,27.8)
DAC1RNIR: R8.2 R9.2 R16.2 R20.1 R22.1 | length 6
  Top Layer w0.254: R20.1 61.7,6.65 63.2,8.15 R8.2 ; R16.2 R22.1 61.7,8.15 62.45,7.4 63.2,6.65 R9.2
DAC1RNNEGE2: R38.2 R44.2 U6.13 | length 5.2
  Top Layer w0.254: U6.13 39.774,43.874 41.734,43.874 R38.2 42.177,43.769 42.927,43.769 44.158,45 R44.2
DAC1RNOUTE2: R38.1 U6.14 | length 2.3
  Top Layer w0.254: U6.14 39.713,45.205 42.003,45.205 R38.1
DAC1ROUT: R18.2 U1.20 | length 2.2
  Top Layer w0.254: R18.2 81.391,15.491 81.391,17.291 U1.20
DAC1ROUTE: R19.2 U5.1 | length 2.1
  Top Layer w0.254: R19.2 43.535,12.262 44.005,11.792 U5.1
DAC1RP: J1.2 U2.10 | length 61.2
  Top Layer w0.254: v1(12,20) 12,21.7 14.1,23.8 U2.10 ; v1(47.6,2.9) 52.84,2.9 J1.2
  Bottom Layer w0.254: v1(12,20) 12,13 17.5,7.5 30.2,7.5 34.8,2.9 v1(47.6,2.9)
DAC1RPE: J10.1 R15.1 | length 6
  Top Layer w0.254: R15.1 47.4,7.5 50.04,4.86 J10.1
DAC1RPE2: J1.1 U6.3 | length 59.3
  Top Layer w0.254: U6.3 34.323,42.685 v1@36.285,42.685 ; v1(38.7,29.6) 39.6,28.7 41.2,28.7 42.5,30 46.2,30 46.9,29.3 v1(48.4,29.3)
  Bottom Layer w0.254: v1(36.3,42.7) 38.7,40.3 v1(38.7,29.6) ; v1(48.4,29.3) 48.4,16.577 47.6,15.777 47.6,10.95 48.85,9.7 49.75,9.7 50.5,8.95 50.5,4 52.18,2.32 J1.1
DAC1RPER: R15.2 R19.1 U5.3 | length 8.3
  Top Layer w0.254: R19.1 41.935,12.262 41.465,11.792 U5.3 41.465,9.335 43.25,7.55 R15.2
DAC1RPI: J2.1 R14.1 | length 2.8
  Top Layer w0.254: J2.1 57.32,4.88 60.08,4.88 R14.1
DAC1RPINT: R7.1 R8.1 U1.81 | length 30
  Top Layer w0.254: R8.1 64.8,9 ; R7.1 64.8,9 ; v1(65.8,9) 64.8,9 ; v1(67.2,28.5) U1.81
  Bottom Layer w0.254: v1(65.8,9) 64.446,10.354 64.446,15.496 60.546,19.396 60.546,21.788 67.2,28.442 v1(67.2,28.5)
DAC1RPIR: R6.2 R7.2 R14.2 R18.1 | length 31.5
  Top Layer w0.254: R14.2 R6.2 63.2,4.95 64,5.75 64,8.95 63.2,9.75 R7.2 63.2,9.85 64.35,11 65.5,11 67.9,8.6 v1(81.1,8.6) ; v1(81.1,12.4) R18.1
  Bottom Layer w0.254: v1(81.1,8.6) v1(81.1,12.4)
DAC1RPNEGE2: R37.2 R43.2 U6.2 | length 5.8
  Top Layer w0.254: R43.2 29.358,45.1 30.958,43.5 R37.2 32.1,43.5 32.54,43.94 U6.2
DAC1RPOUTE2: R37.1 U6.1 | length 3.3
  Top Layer w0.254: R37.1 31.063,45.155 34.253,45.155 U6.1
DACGND: C8.1 C9.1 R5.2 U1.31 U2.16 U4.3 | length 106.7
  Top Layer w0.254: v1(15,4.1) C8.1 R5.2 16.5,6.25 18.044,7.794 18.044,8.494 U4.3 18.25,8.5 21,11.25 21,18.8 C9.1 U2.16 ; v1(82.1,21.5) U1.31
  Bottom Layer w0.254: v1@15,4 18,1 66.4,1 71,5.6 71,13.1 76.346,18.446 81.046,18.446 81.919,19.319 81.919,19.331 82.1,19.512 v1(82.1,21.5)
DACVDD: C9.2 R4.2 U1.30 U2.17 U4.2 | length 108.3
  Top Layer w0.254: U4.2 16.65,7.55 16.9,7.8 16.9,9.556 17.7,10.356 R4.2 v1(19,11.5) ; U2.17 21.5,19.925 22.3,19.125 C9.2 22,18.8 v1(22,9.7) 22,3.5 24.5,1 28,1 v1(29.5,2.5) ; v1(50.473,2) 51.473,1 57.6,1 58.7,2.1 69.1,2.1 v1(73.5,6.5) ; v1(83.2,20.5) 84.098,20.5 84.598,21 U1.30
  Bottom Layer w0.254: v1(19,11.5) 20.2,11.5 v1(22,9.7) ; v1(29.5,2.5) 33.375,2.5 33.875,2 v1(50.473,2) ; v1(73.5,6.5) 73.5,14.798 76.402,17.7 80.642,17.7 80.934,17.992 81.234,17.992 82.373,19.131 82.373,19.143 82.554,19.324 82.554,19.612 83.442,20.5 v1(83.2,20.5)
GND: C1.1 C2.1 C3.1 C4.1 C5.1 C6.1 C7.1 D1.2 D1.5 D2.1 D3.1 J3.3 J4.3 J5.5 J5.6 J5.7 J5.8 J5.9 J14.2 R5.1 R41.2 U1.15 U1.45 U1.65 U1.75 U2.6 U2.29 U2.39 U3.2 | length 37.6
  Top Layer w0.254: D3.1 2.81,35.35 3.7,34.46 v1(3.7,34.4) ; v1(10.5,32.5) 10.525,32.525 11.625,32.525 D2.1 ; C4.1 v1(13.743,27.8) 14.543,27 U2.6 ; R5.1 v1(19.6,5.5) ; U2.39 v1(21.5,34.4) ; U2.29 v1(28.9,27.8) 29.727,28.627 29.727,28.916 ; R41.2 v1(45.1,41.4) ; v1(62.4,26.5) C3.1 ; v1(71.4,34.6) 71.9,34.1 U1.75 ; C2.1 v1(75.9,39.3) 76,39.4 77,39.4 C1.1 77.1,39.525 78.2,40.625 J5.5 ; C5.1 v1(76.5,2.4) ; v1(76.2,34.4) 76.891,33.709 76.891,32.709 U1.65 ; v1(78.9,15.4) U1.15 ; D1.5 v1(82.5,36.5) D1.2 v1(85,36.5) U3.2 ; v1(83.8,27.7) 84.591,28.491 85.591,28.491 U1.45 ; v1(91,34.1) C7.1
MCLRPIC24: C5.2 J3.1 R1.1 U1.13 | length 18.8
  Top Layer w0.254: C5.2 77.88,4 J3.1@77.9,4.02 ; v1(77.9,14.4) U1.13 ; J3.1 J3.1@77.9,4.02 ; R1.1 78.3,5.5 77.9,5.1 J3.1@77.9,4.02
  Bottom Layer w0.254: v1(77.9,14.4) 77.9,4.02 J3.1
MCLRPIC33: C6.2 J4.1 R2.1 U2.18 | length 39.8
  Top Layer w0.254: J4.1 6.5,31.88 5.92,31.3 R2.1 C6.2 2.5,31.3 2.2,31 2.2,27 5.754,23.446 5.754,19.988 6.842,18.9 14.1,18.9 14.849,19.649 14.849,21.449 15.652,22.252 16.652,22.252 17.4,23 21.8,23 22.3,22.5 U2.18
OSCI: C1.2 U1.63 Y1.1 | length 7.3
  Top Layer w0.254: U1.63 77.9,36.35 Y1.1@78.8,37.25 ; C1.2 78.7,37.35 Y1.1@78.8,37.25 ; Y1.1 Y1.1@78.8,37.25
OSCO: C2.2 U1.64 Y1.3 | length 6.4
  Top Layer w0.254: C2.2 74.664,37.7 75.314,37.05 75.6,37.05 76.9,35.75 Y1.3 76.979,35.75 77.4,35.329 U1.64
PGCPIC24: J3.5 U1.26 | length 17
  Top Layer w0.254: U1.26@85.591,18.991 U1.26 85.609,18.991 87.309,18.991 88.1,18.2 v1(88.1,11.7)
  Bottom Layer w0.254: J3.5@88.09,4.01 88.09,11.69 v1(88.1,11.7)
PGCPIC33: J4.5 U1.51 U2.9 | length 88.9
  Top Layer w0.254: J4.5 10.88,24.6 U2.9 19.457,24.6 20.357,23.7 22.1,23.7 22.8,23 v1(24,23) ; v1(39,23) 43.2,23 43.7,23.5 61.9,23.5 62.3,23.1 v1(64.142,23.1) ; U1.51 83.9,32.671 U1.51@83.921,32.65 ; U1.51@83.909,32.709 v1(84.8,32.709)
  Bottom Layer w0.254: v1(24,23) 24.7,22.3 30.6,22.3 31.7,21.2 37.2,21.2 v1(39,23) ; v1(64.142,23.1) 65.55,24.508 74.108,24.508 75.2,25.6 78.1,25.6 78.8,26.3 78.8,32.15 79.359,32.709 v1(84.8,32.709)
PGDPIC24: J3.4 U1.27 | length 17.1
  Top Layer w0.254: v1(85.557,12.2) 86.4,13.043 86.4,15.157 84.4,17.157 84.4,19.141 84.75,19.491 85.591,19.491 U1.27
  Bottom Layer w0.254: J3.4 85.557,4.017 85.557,11.608
PGDPIC33: J4.4 U1.41 U2.8 | length 85.6
  Top Layer w0.254: J4.4 9.14,25.4 11.979,25.4 11.981,25.398 13.019,25.398 13.021,25.4 U2.8 19.9,25.4 20.798,24.502 v1(22.5,24.5) v1(22.5,24.5) ; v1(37.5,23) 38.515,21.985 43.585,21.985 44.631,23.031 51.869,23.031 52.4,22.5 61.959,22.5 62.253,22.206 v1(63.1,22.206) ; v1(80.4,28.1) 81.1,27.4 82.3,27.4 83.191,26.509 85.591,26.509 U1.41 ; v1(22.5,24.5) 22.649,24.351 22.5,24.202 v1(22.5,24.5)
  Bottom Layer w0.254: v1(22.5,24.5) 24,24.5 25.5,23 31.3,23 32.4,21.9 36.4,21.9 v1(37.5,23) ; v1(63.1,22.206) 63.121,22.227 64.442,22.227 66.269,24.054 74.296,24.054 74.842,24.6 77.891,24.6 80.4,27.109 v1(80.4,28.1)
PMA0: U1.44 U2.19 | length 96.3
  Top Layer w0.254: U2.19 23.102,21.298 23.102,15.398 24.5,14 27.8,14 29.209,15.409 56.141,15.409 58.042,13.508 65.238,13.508 68.338,10.408 79.476,10.408 79.484,10.4 88.315,10.4 89,11.085 v1(89,18.5) ; U1.44 86.5,28 87.3,28.8 88.2,28.8 v1(89,28)
  Bottom Layer w0.254: v1(89,18.5) v1(89,28)
PMA1: U1.43 U2.20 | length 90.4
  Top Layer w0.254: U2.20 23.9,15.4 24.846,14.454 27.612,14.454 29.021,15.863 56.437,15.863 58.338,13.962 65.426,13.962 68.488,10.9 86.388,10.9 87.1,11.612 v1(87.1,17.7) ; U1.43 v1(87.5,27.5)
  Bottom Layer w0.254: v1(87.1,17.7) 87.1,18.782 87.5,19.182 v1(87.5,27.5)
PMA2: U1.14 U2.30 | length 63.8
  Top Layer w0.254: U2.30 28.3,28.6 30.754,31.054 60.346,31.054 62.2,29.2 v1(65.858,29.2) ; v1(77.8,26.7) 77.8,20.4 78.4,19.8 U1.14
  Bottom Layer w0.254: v1(65.858,29.2) 66.358,29.7 68.654,29.7 69.054,30.1 72.446,30.1 73.954,28.592 73.975,28.592 74.921,27.646 75.881,27.646 76.827,26.7 v1(77.8,26.7)
PMA3: U1.12 U2.31 | length 65.1
  Top Layer w0.254: U2.31 28.424,29.4 30.532,31.508 61.292,31.508 v1(62.4,30.4) ; U1.12 77.4,19.768 76.973,20.195 76.973,27.173 v1@77.68,27.88
  Bottom Layer w0.254: v1(62.4,30.4) 63.3,29.5 64.7,29.5 65.665,30.465 67.223,30.465 67.469,30.219 68.531,30.219 68.866,30.554 72.634,30.554 74.142,29.046 74.163,29.046 75.109,28.1 76.43,28.1 76.457,28.073 77.142,28.073 77.169,28.1 v1(77.9,28.1)
PMA4: U1.11 U2.34 | length 68.4
  Top Layer w0.254: U2.34 25.557,32.757 25.557,33.643 25.705,33.792 29.524,33.792 29.966,33.35 66.25,33.35 66.788,32.812 67.888,32.812 v1(67.9,32.8) ; U1.11 76.9,19.56 76.3,20.16 76.3,28.6 v1@76.9,29.2
  Bottom Layer w0.254: v1(67.9,32.8) 67.909,32.791 75.842,32.791 76.8,31.833 v1(76.8,28.9)
PMA5: U1.10 U2.4 | length 71.4
  Top Layer w0.254: U2.4 17.262,28.6 18.872,26.991 20.709,26.991 21.2,26.5 v1(22.5,26.5) ; v1(36,23) 37.5,21.5 49.03,21.5 50.03,22.5 51.7,22.5 52.2,22 54.913,22 54.937,22.024 61.793,22.024 62.917,20.9 63.6,20.9 v1(64.1,21.4) ; v1(75.3,23.6) 75.8,23.1 75.8,19.9 76.4,19.3 U1.10
  Bottom Layer w0.254: v1(22.5,26.5) 25.716,26.5 27.424,24.792 33.35,24.792 33.634,24.508 34.492,24.508 v1(36,23) ; v1(64.1,21.4) 64.9,21.4 67.1,23.6 v1(75.3,23.6)
PMA6: U1.29 U2.5 | length 81.9
  Top Layer w0.254: U2.5 15.857,27.743 17.257,27.743 18.5,26.5 20.5,26.5 v1(21.5,25.5) ; v1(30,21.1) 30.1,21.1 30.708,20.492 54.031,20.492 54.917,21.378 54.933,21.378 55.125,21.57 59.21,21.57 60.334,20.446 v1(61.9,20.446) ; v1(80.4,25.3) 80.4,23.4 81.2,22.6 81.2,21.2 82.727,19.673 83.913,19.673 84.74,20.5 U1.29
  Bottom Layer w0.254: v1(21.5,25.5) 21.5,23.1 23.5,21.1 v1(30,21.1) ; v1(61.9,20.446) 64.749,20.446 67.199,22.896 74.835,22.896 74.957,22.773 75.643,22.773 76.997,24.127 79.227,24.127 v1(80.4,25.3)
PMA7: U1.28 U2.13 | length 93.9
  Top Layer w0.254: v1(17.5,19.6) 17.975,19.6 18.3,19.925 U2.13 ; v1(29.9,13.9) 30.9,14.9 55.9,14.9 57.746,13.054 65.05,13.054 68.15,9.954 79.288,9.954 79.296,9.946 89.046,9.946 89.9,10.8 89.9,19.3 89.209,19.991 85.591,19.991 U1.28
  Bottom Layer w0.254: v1(17.5,19.6) 17.5,18.55 22.445,13.605 27.663,13.605 27.958,13.9 v1(29.9,13.9)
PMA8: U1.50 U2.32 | length 61.7
  Top Layer w0.254: U2.32 28.582,30.2 30.344,31.962 62.538,31.962 v1(63.9,30.6) ; v1@75.15,29.65 75.32,29.65 75.57,29.9 75.8,29.9 76.2,30.3 77.384,30.3 77.838,29.846 81.688,29.846 82.142,30.3 83.6,30.3 84.3,31 U1.50
  Bottom Layer w0.254: v1(63.9,30.6) 63.946,30.6 64.546,31.2 67.13,31.2 67.657,30.673 68.343,30.673 68.678,31.008 72.822,31.008 74.33,29.5 v1(75,29.5)
PMA9: U1.49 U2.35 | length 70.1
  Top Layer w0.254: U2.35 24.7,33.854 25.092,34.246 29.712,34.246 30.154,33.804 68.096,33.804 69.049,32.851 69.049,32.351 69.8,31.6 71.024,31.6 73.3,29.324 v1(73.3,26.8) ; v1(75.4,26.8) 75.4,28.7 76.546,29.846 77.112,29.846 77.566,29.392 81.876,29.392 82.33,29.846 83.788,29.846 84.442,30.5 U1.49
  Bottom Layer w0.254: v1(73.3,26.8) 73.327,26.827 73.354,26.8 v1(75.4,26.8)
PMA10: U1.42 U2.12 | length 106.4
  Top Layer w0.254: v1(16.1,21.298) 16.102,21.3 U2.12 ; v1(28.6,12.9) 30.5,12.9 30.8,13.2 32,14.4 55.6,14.4 57.4,12.6 64.862,12.6 67.962,9.5 79.1,9.5 79.108,9.492 89.692,9.492 90.8,10.6 v1(90.8,18.446) ; U1.42 86.625,27 87.125,26.5 89.5,26.5 v1(90.5,27.5)
  Bottom Layer w0.254: v1(16.1,21.298) 16.1,19.308 22.508,12.9 v1(28.6,12.9) ; v1(90.5,27.5) 90.5,18.746 v1(90.8,18.446)
PMD0: U1.93 U2.21 | length 57.8
  Top Layer w0.254: U2.21 24.7,20.3 25.1,19.9 26.9,19.9 28.78,18.02 54.785,18.02 55.373,18.608 55.373,18.624 55.857,19.108 55.873,19.108 56.065,19.3 58.27,19.3 60.513,17.057 66.267,17.057 67.23,18.02 71.262,18.02 72.354,19.112 72.354,19.342 73.154,20.142 73.154,21.146 71.8,22.5 U1.93
PMD1: U1.94 U2.22 | length 54.8
  Top Layer w0.254: U2.22 25.5,21.089 25.637,20.952 26.548,20.952 29,18.5 54.623,18.5 54.919,18.796 54.919,18.812 55.669,19.562 55.685,19.562 55.877,19.754 58.458,19.754 60.701,17.511 66.079,17.511 67.068,18.5 71.1,18.5 71.9,19.3 71.9,19.53 72.7,20.33 72.7,20.952 71.652,22 U1.94
PMD2: U1.98 U2.23 | length 46.6
  Top Layer w0.254: U2.23 27.411,23 27.548,22.863 27.548,22.052 29.6,20 54.181,20 55.105,20.924 55.121,20.924 55.313,21.116 59.022,21.116 61.265,18.873 65.035,18.873 66.154,19.992 70.192,19.992 U1.98
PMD3: U1.99 U2.24 | length 49.5
  Top Layer w0.254: U2.24 27.149,23.749 26.149,23.749 26,23.6 26,22.874 29.374,19.5 54.323,19.5 55.293,20.47 55.309,20.47 55.501,20.662 58.834,20.662 61.077,18.419 65.703,18.419 66.784,19.5 U1.99
PMD4: U1.100 U2.33 | length 57.6
  Top Layer w0.254: U2.33 26.5,31 25.827,30.327 25.827,24.327 25.4,23.9 25.4,22.8 29.2,19 54.465,19 55.481,20.016 55.497,20.016 55.689,20.208 58.646,20.208 60.889,17.965 65.891,17.965 66.926,19 U1.100
PMD5: U1.3 U2.41 | length 70.1
  Top Layer w0.254: v1(19.9,30.743) U2.41 ; v1(27.5,17.4) 29.4,17.4 57.3,17.4 59.3,15.4 72.3,15.4 72.9,16 U1.3
  Bottom Layer w0.254: v1(19.9,30.743) 19.9,18.3 20.8,17.4 v1(27.5,17.4)
PMD6: U1.4 U2.42 | length 72.8
  Top Layer w0.254: v1(18.7,31.2) 18.7,31.423 19.1,31.823 U2.42 ; v1(26.4,16.4) 27.9,16.4 28.4,16.9 57,16.9 58.954,14.946 72.646,14.946 73.4,15.7 U1.4
  Bottom Layer w0.254: v1(18.7,31.2) 18.7,30.5 19.281,29.919 19.281,18.069 20.95,16.4 v1(26.4,16.4)
PMD7: U1.5 U2.43 | length 79.7
  Top Layer w0.254: v1(16.3,32.1) 16.3,33.035 17.465,34.2 17.9,34.2 18.269,33.831 18.269,32.731 U2.43 ; v1(25.3,15.398) 27.898,15.398 28.9,16.4 56.7,16.4 58.684,14.416 72.916,14.416 73.9,15.4 U1.5
  Bottom Layer w0.254: v1(16.3,32.1) 16.4,32.1 18.827,29.673 18.827,22.657 18.8,22.63 18.8,17.898 21.3,15.398 v1(25.3,15.398)
PMD8: U1.90 U2.44 | length 60.2
  Top Layer w0.254: U2.44 17.5,30.93 19.457,28.973 20.273,28.973 21.081,29.781 23.119,29.781 25,27.9 v1(25,25.5) ; v1(34.5,23) 35.5,24 U1.90
  Bottom Layer w0.254: v1(25,25.5) 26.074,25.5 27.236,24.338 33.162,24.338 v1(34.5,23)
PMD9: U1.89 U2.1 | length 61.3
  Top Layer w0.254: U2.1 15.857,30.943 16.845,30.943 19.269,28.519 20.531,28.519 21.339,29.327 22.931,29.327 23.927,28.331 23.927,25.927 v1(23.5,25.5) ; v1(32.5,23) 32.5,23.1 33.9,24.5 U1.89
  Bottom Layer w0.254: v1(23.5,25.5) 23.642,25.5 24.542,24.6 26.332,24.6 27.048,23.884 31.616,23.884 v1(32.5,23)
PMD10: U1.88 U2.27 | length 44
  Top Layer w0.254: U2.27 30.8,26.2 v1(31.4,26.8) ; v1(34,26.8) 35.8,25 U1.88
  Bottom Layer w0.254: v1(31.4,26.8) v1(34,26.8)
PMD11: U1.87 U2.36 | length 62.3
  Top Layer w0.254: U2.36 23.957,32.757 23.957,33.757 24.9,34.7 29.9,34.7 30.342,34.258 70.442,34.258 71.2,33.5 71.2,32.1 74.4,28.9 74.4,26.312 73.588,25.5 U1.87
PMD12: U1.79 U2.37 | length 50.3
  Top Layer w0.254: U2.37 23.1,31.7 23.5,31.3 25.515,31.3 26.615,32.4 29.498,32.4 29.968,32.87 62.914,32.87 63.384,32.4 64.142,32.4 65.188,31.354 66.288,31.354 68.142,29.5 U1.79
PMD13: U1.80 U2.38 | length 51.4
  Top Layer w0.254: U2.38 22.3,31.649 23.149,30.8 25.658,30.8 26.658,31.8 29.54,31.8 30.156,32.416 62.726,32.416 63.342,31.8 64.1,31.8 65,30.9 66.1,30.9 68,29 U1.80
PMD14: U1.83 U2.2 | length 58.3
  Top Layer w0.254: U2.2 16.946,30.2 19.081,28.065 20.719,28.065 21.173,28.519 22.481,28.519 v1(22.5,28.5) ; v1(35.5,26.827) 41.621,26.827 41.948,26.5 59.658,26.5 61.458,28.3 65.9,28.3 66.7,27.5 U1.83
  Bottom Layer w0.254: v1(22.5,28.5) 25,28.5 27.8,25.7 34.373,25.7 v1(35.5,26.827)
PMD15: U1.84 U2.3 | length 57.4
  Top Layer w0.254: U2.3 17.104,29.4 19.004,27.5 v1(21.5,27.5) ; v1(36.7,26) 59.8,26 61.5,27.7 65.858,27.7 66.558,27 U1.84
  Bottom Layer w0.254: v1(21.5,27.5) 25.358,27.5 27.612,25.246 35.946,25.246 v1(36.7,26)
RA0: U1.17 | length 5.4
  Top Layer w0.254: U1.17 79.9,18.685 79.4,19.185 79.4,21.544 v1@80.1,22.244
  other v1: 80.2,22
RA1: U1.38 | length 9.4
  Top Layer w0.254: U1.38 91.5,25 93.3,26.8 v1(94,27.5)
RA2: U1.58 | length 1.4
  Top Layer w0.254: U1.58 80.4,31.8 v1@80.757,31.443
  other v1: 81,31.2
RA3: U1.59 | length 1.5
  Top Layer w0.254: v1@79.8,34.15 79.9,34.05 U1.59
  other v1: 80,34.1
RA4: U1.60 | length 1.6
  Top Layer w0.254: U1.60 79.4,31.4 v1@79.6,31.2
  other v1: 79.7,31.2
RA5: U1.61 | length 1.5
  Top Layer w0.254: v1@78.85,34.2 78.9,34.15 U1.61
  other v1: 78.8,34.5
RA6: U1.91 | length 8.9
  Top Layer w0.254: U1.91 74.05,23.5 75.3,22.25 v1(75.3,19)
RA7: U1.92 | length 8.6
  Top Layer w0.254: U1.92 73.908,23 74.664,22.244 74.664,19.676 v1(73.8,18.812)
RA14: U1.66 | length 2.8
  Top Layer w0.254: U1.66 76.4,31.47 76.427,31.443 76.427,31.427 76.8,31.054 v1(77.8,31.054)
RA15: U1.67 | length 1.7
  Top Layer w0.254: v1(75.6,31.1) 75.9,31.4 U1.67
RB0: U1.25 | length 2.9
  Top Layer w0.254: U1.25 83.9,16.7 84.8,15.8 84.8,15.5 v1@85.3,15
  other v1: 85.2,15.1
RB1: U1.24 | length 4.7
  Top Layer w0.254: U1.24 83.409,17.291 83.409,16.491 84.098,15.802 84.098,14.093 v1@84.966,13.226
  other v1: 84.7,13.491
RB2: U1.23 | length 6.2
  Top Layer w0.254: U1.23 82.909,17.291 82.909,16.291 83.54,15.66 83.54,12.61 v1(84.2,11.95) v1@84.2,11.612
RB5: U1.21 | length 2.4
  Top Layer w0.254: U1.21 81.891,17.309 81.891,18.109 82.282,18.5 82.582,18.8 v1(83.2,18.8)
RC1: U1.6 | length 4.8
  Top Layer w0.254: v1(74.4,12.5) U1.6
RC2: U1.7 | length 5.5
  Top Layer w0.254: U1.7 74.9,14.1 v1(76.5,12.5)
RC3: U1.8 | length 3.8
  Top Layer w0.254: U1.8 75.4,15.1 v1(76.5,14)
RC4: U1.9 | length 2
  Top Layer w0.254: U1.9 75.9,16.1 v1(76.5,15.5)
RC13: U1.73 | length 7.5
  Top Layer w0.254: v1@68.802,35.502 69.047,35.502 70.092,36.546 71.37,36.546 72.9,35.016 U1.73
  other v1: 68.8,35.254
RC14: U1.74 | length 5.2
  Top Layer w0.254: v1(70.1,35.3) 70.1,35.309 70.791,36 71.274,36 72.4,34.874 U1.74
RD0: U1.72 | length 9.9
  Top Layer w0.254: v1@67.654,35.254 67.654,35.509 69.168,37.022 71.536,37.022 73.4,35.158 U1.72
  other v1: 67.4,35.254
RD1: U1.76 | length 2.8
  Top Layer w0.254: U1.76 70.209,30.991 70.983,30.991 71.8,30.175 v1@71.8,29.3
  other v1: 71.724,29.1
RD9: U1.69 | length 2.2
  Top Layer w0.254: v1(73.9,31.1) 74.3,31.1 74.891,31.691 74.891,32.691 U1.69
RD14: U1.47 | length 4.6
  Top Layer w0.254: U1.47 86.054,29.5 89.5,29.5 v1(90,30)
RD15: U1.48 | length 5.4
  Top Layer w0.254: U1.48 87.5,30 v1(90,32.5)
RE8: U1.18 | length 4
  Top Layer w0.254: v1@80.3,20.9 80.3,20.414 79.9,20.014 79.9,19.361 80.4,18.861 U1.18
  other v1: 80.46,20.7
RE9: U1.19 | length 2.5
  Top Layer w0.254: U1.19 v1@80.9,19.754
  other v1: 80.93,19.5
RF2: U1.52 | length 3.6
  Top Layer w0.254: U1.52 83.409,32.709 83.409,33.483 83.734,33.809 85.391,33.809 v1(85.9,33.3)
RF8: U1.53 | length 5.2
  Top Layer w0.254: U1.53 82.909,32.709 82.909,33.625 83.583,34.3 v1(86.8,34.3) v1@86.9,34.4
RF12: U1.40 | length 13.2
  Top Layer w0.254: U1.40 91.1,26 92.3,27.2 92.3,30.8 v1(94,32.5)
RF13: U1.39 | length 11.3
  Top Layer w0.254: U1.39 91.3,25.5 92.9,27.1 92.9,28.9 v1(94,30)
RG12: U1.96 | length 3.6
  Top Layer w0.254: v1(66.606,21) U1.96
RG13: U1.97 | length 1.5
  Top Layer w0.254: U1.97 v1(71.7,20.5)
RG14: U1.95 | length 2.2
  Top Layer w0.254: v1(68.2,22.024) 68.724,21.5 U1.95
RG15: U1.1 | length 2.9
  Top Layer w0.254: v1(69.1,17) 70.249,17 70.549,17.3 U1.1
VBAT: U1.86 | length 1.9
  Top Layer w0.254: U1.86 71.5,26 v1(71.9,26.4)
VCAPPIC24: C3.2 U1.85 | length 4.8
  Top Layer w0.254: C3.2 U1.85
VCAPPIC33: C4.2 U2.7 | length 3.3
  Top Layer w0.254: C4.2 U2.7
VCC: R34.1 R36.1 R42.1 U5.8 U6.4 | length 69.8
  Top Layer w0.254: R42.1 R36.1@31.008,41.888 ; R36.1 R36.1@31.008,41.888 ; v1(32.6,12.8) 32.6,6.1 34.8,3.9 37.55,3.9 38.4,3.05 R34.1 39.3,2.1 43.08,2.1 44.005,3.025 U5.8 ; v1(36.8,40.7) 36.1,41.4 U6.4 31.496,41.4 R36.1@31.008,41.888
  Bottom Layer w0.254: v1(32.6,12.8) 33.6,12.8 34.4,12 35.842,12 42.454,18.612 42.454,28.046 41.9,28.6 38.242,28.6 37.6,29.242 37.6,30.3 37.9,30.6 37.9,39.6 v1(36.8,40.7)
VCC-: R35.1 R41.1 R43.1 R44.1 R45.1 R46.1 U5.4 U6.11 | length 113.4
  Top Layer w0.254: R43.1 29.234,43.427 27.6,43.427 27,43.427 ; v1(32.3,35.7) 29.6,35.7 29.308,35.992 R45.1 28.3,37.1 27,38.4 27,43.427 ; v1(35.1,13) 38.95,13 40.195,11.755 U5.4 40.259,10.333 40.259,9.241 43.1,6.4 44.7,6.4 45.3,5.8 45.3,3.4 43.2,1.3 R35.1 ; R41.1 U6.11 37.8,41.4 ; R41.1@42.587,41.679 42.587,41.829 44.158,43.4 R44.1 ; R46.1 44.258,39.1 45.5,37.858 45.5,36.9 44.8,36.2 38.95,36.2 37.8,37.35 37.8,41.4 ; 27,43.427 27,45.251 28.349,46.6 35.8,46.6 37.273,45.127 37.273,41.927 37.8,41.4
  Bottom Layer w0.254: v1(32.3,35.7) 36.5,35.7 37,35.2 37,29.2 38.1,28.1 41.6,28.1 42,27.7 42,18.8 36.2,13 v1(35.1,13)
VCC_HALF: R22.2 R23.2 R32.2 R33.2 | length 76.7
  Top Layer w0.254: R33.2 35.65,6.55 33.7,8.5 33.7,13.3 34.3,13.9 48.598,13.9 49.198,13.3 v1(49.3,13.3) ; R23.2 v1(49.3,10.75) ; v1@49.2,13.1 49.3,13.2 v1(49.3,13.3) ; v1(58.5,8.7) 59,8.2 R22.2 ; v1(58.7,39.4) 58.902,39.4 59.269,39.767 59.967,39.767 R32.2 ; v1(59.1,11.1) 58.2,11.1 55.4,13.9 52.8,13.9 v1(52.2,13.3) v1(49.3,13.3)
  Bottom Layer w0.254: v1(49.3,10.75) v1(49.3,13.3) ; v1(52.2,13.3) 53,13.3 54.1,14.4 54.1,26.2 53.5,26.8 53.5,30.952 54.4,31.852 54.4,33.2 56.3,35.1 56.3,35.6 57.45,36.75 57.75,36.75 58.7,37.7 v1(58.7,39.4) ; v1(58.5,8.7) 59.1,9.3 v1(59.1,11.1)
VDD: C7.2 J3.2 J4.2 R1.2 R2.2 R36.2 U1.2 U1.16 U1.46 U1.55 U1.62 U2.28 U2.40 U3.5 | length 178.8
  Top Layer w0.254: R2.2 5.28,29.52 7.82,29.52 J4.2 11.963,29.34 17.423,34.8 19.8,34.8 ; v1(24.7,29.52) 23.874,30.346 21.654,30.346 20.7,31.3 U2.40 20.7,33.9 19.8,34.8 ; v1(25.3,41.9) 26.3,40.9 26.3,39 25.2,37.9 22.9,37.9 19.8,34.8 ; U2.28 27.231,26.969 29.469,26.969 v1(30.3,27.8) 31,28.5 38.58,28.5 38.834,28.246 42.446,28.246 43.6,29.4 45.9,29.4 47.8,27.5 v1(56.2,27.5) ; v1(28,41.9) R36.2 ; v1(56.2,18.281) 57.319,18.281 59.6,16 72.2,16 72.391,16.191 72.391,17.291 U1.2 72.4,18.516 72.808,18.924 72.808,19.154 73.7,20.046 v1(73.7,21.976) ; U1.62 78.409,32.691 78.409,31.615 78.737,31.286 78.737,30.613 79.05,30.3 81.5,30.3 81.9,30.7 81.9,31.2 ; R1.2 79.9,6.412 80.5,5.812 80.5,4.04 J3.2 ; v1(79.9,14.4) 79.9,15.7 79.409,16.191 79.409,17.291 U1.16 79.4,18.35 78.9,18.85 78.9,22.7 v1(79.4,23.2) 79.4,28.3 80.038,28.938 81.337,28.938 v1(81.975,28.3) 83.23,28.3 83.907,28.977 85.577,28.977 U1.46 ; U1.55 81.9,31.2 ; C7.2 90.925,37.375 88.875,37.375 U3.5 88.15,37.45 87.8,37.1 87.8,33.254 86.146,31.6 84,31.6 83.6,31.2 v1(82.9,31.2) 81.9,31.2
  Bottom Layer w0.254: v1(24.7,29.52) 27.247,26.973 29.473,26.973 v1(30.3,27.8) ; v1(25.3,41.9) v1(28,41.9) ; v1(56.2,18.281) v1(56.2,27.5) ; v1(73.7,21.976) 77.224,21.976 78.448,23.2 v1(79.4,23.2) ; v1(79.9,14.4) 79.9,6.5 80.46,5.94 J3.2 ; v1(81.975,28.3) 81.975,31.125 82.051,31.2 v1(82.9,31.2)
pads on no net: D2.2 D3.2 J5.10 J5.11 J6.1 J7.1 J8.1 J9.1 U1.101 U1.102 U3.4 Y1.2 Y1.4
copper on no net: | length 300
  Top Layer w0.254: 0,0 100,0 100,50 0,50 0,0

## Polygon pours and split planes (outlines as drawn)
GND on Top Layer "Top Layer-GND" (solid, pour order 0): 0,0 100,0 100,50 0,50
GND on Bottom Layer "Bottom Layer-GND" (solid, pour order 2): 0,0 100,0 100,50 0,50

## Text inside footprints (layer, text, board x,y; h text height)
J1: Mechanical 3 "5" at 55.75,13.183 h0.5 r90; Mechanical 3 "1" at 55.75,1.34 h0.5 r90
J2: Mechanical 3 "1" at 58.2,3.89 h0.5 r90; Mechanical 3 "3" at 58.25,10.633 h0.5 r90
J3: Mechanical 3 "5" at 88.783,3.05 h0.5; Mechanical 3 "1" at 76.94,3.05 h0.5
J4: Mechanical 3 "5" at 7.05,21.017 h0.5 r270; Mechanical 3 "1" at 7.05,32.86 h0.5 r270
J5: Mechanical 3 "1" at 81.46,44.7 h0.5 r180; Mechanical 3 "5" at 78.317,44.7 h0.5 r180
J10: Mechanical 3 "3" at 53.25,10.633 h0.5 r90; Mechanical 3 "1" at 53.2,3.89 h0.5 r90
J11: Mechanical 3 "5" at 55.75,46.483 h0.5 r90; Mechanical 3 "1" at 55.75,34.64 h0.5 r90
J12: Mechanical 3 "3" at 58.25,43.933 h0.5 r90; Mechanical 3 "1" at 58.2,37.19 h0.5 r90
J13: Mechanical 3 "3" at 53.25,43.933 h0.5 r90; Mechanical 3 "1" at 53.2,37.19 h0.5 r90
J14: Mechanical 3 "1" at 25.01,44.65 h0.5 r180
J15: Mechanical 3 "3" at 98.45,23.233 h0.5 r90; Mechanical 3 "1" at 98.4,16.49 h0.5 r90
J16: Mechanical 3 "3" at 98.45,30.733 h0.5 r90; Mechanical 3 "1" at 98.4,23.99 h0.5 r90